# EAGLE board Data-logger_v01-01 (EAGLE 9.6.2)
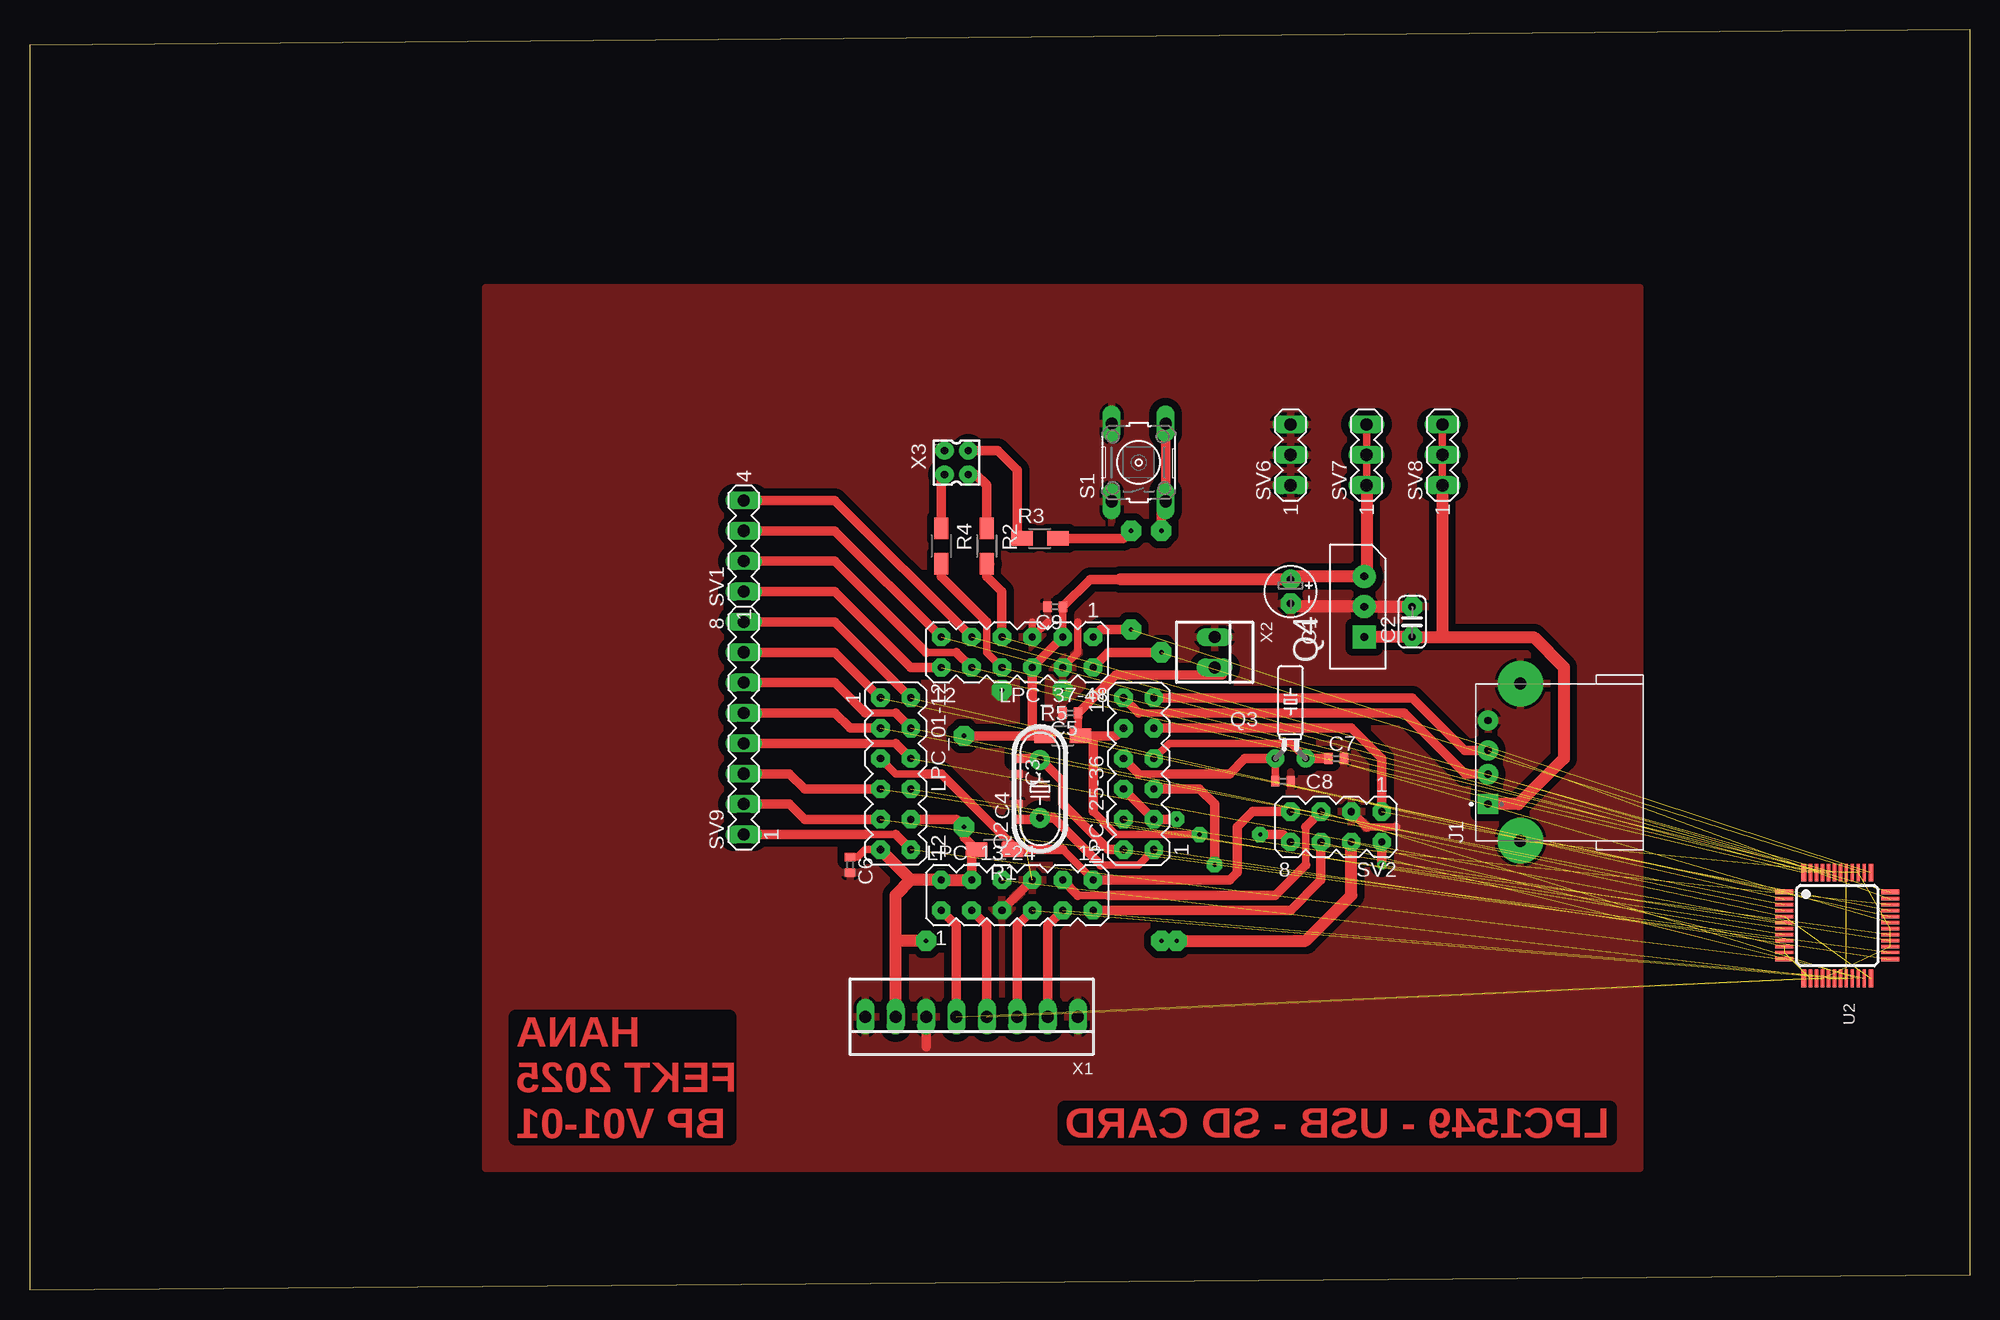
[diagram p0: board, top side]
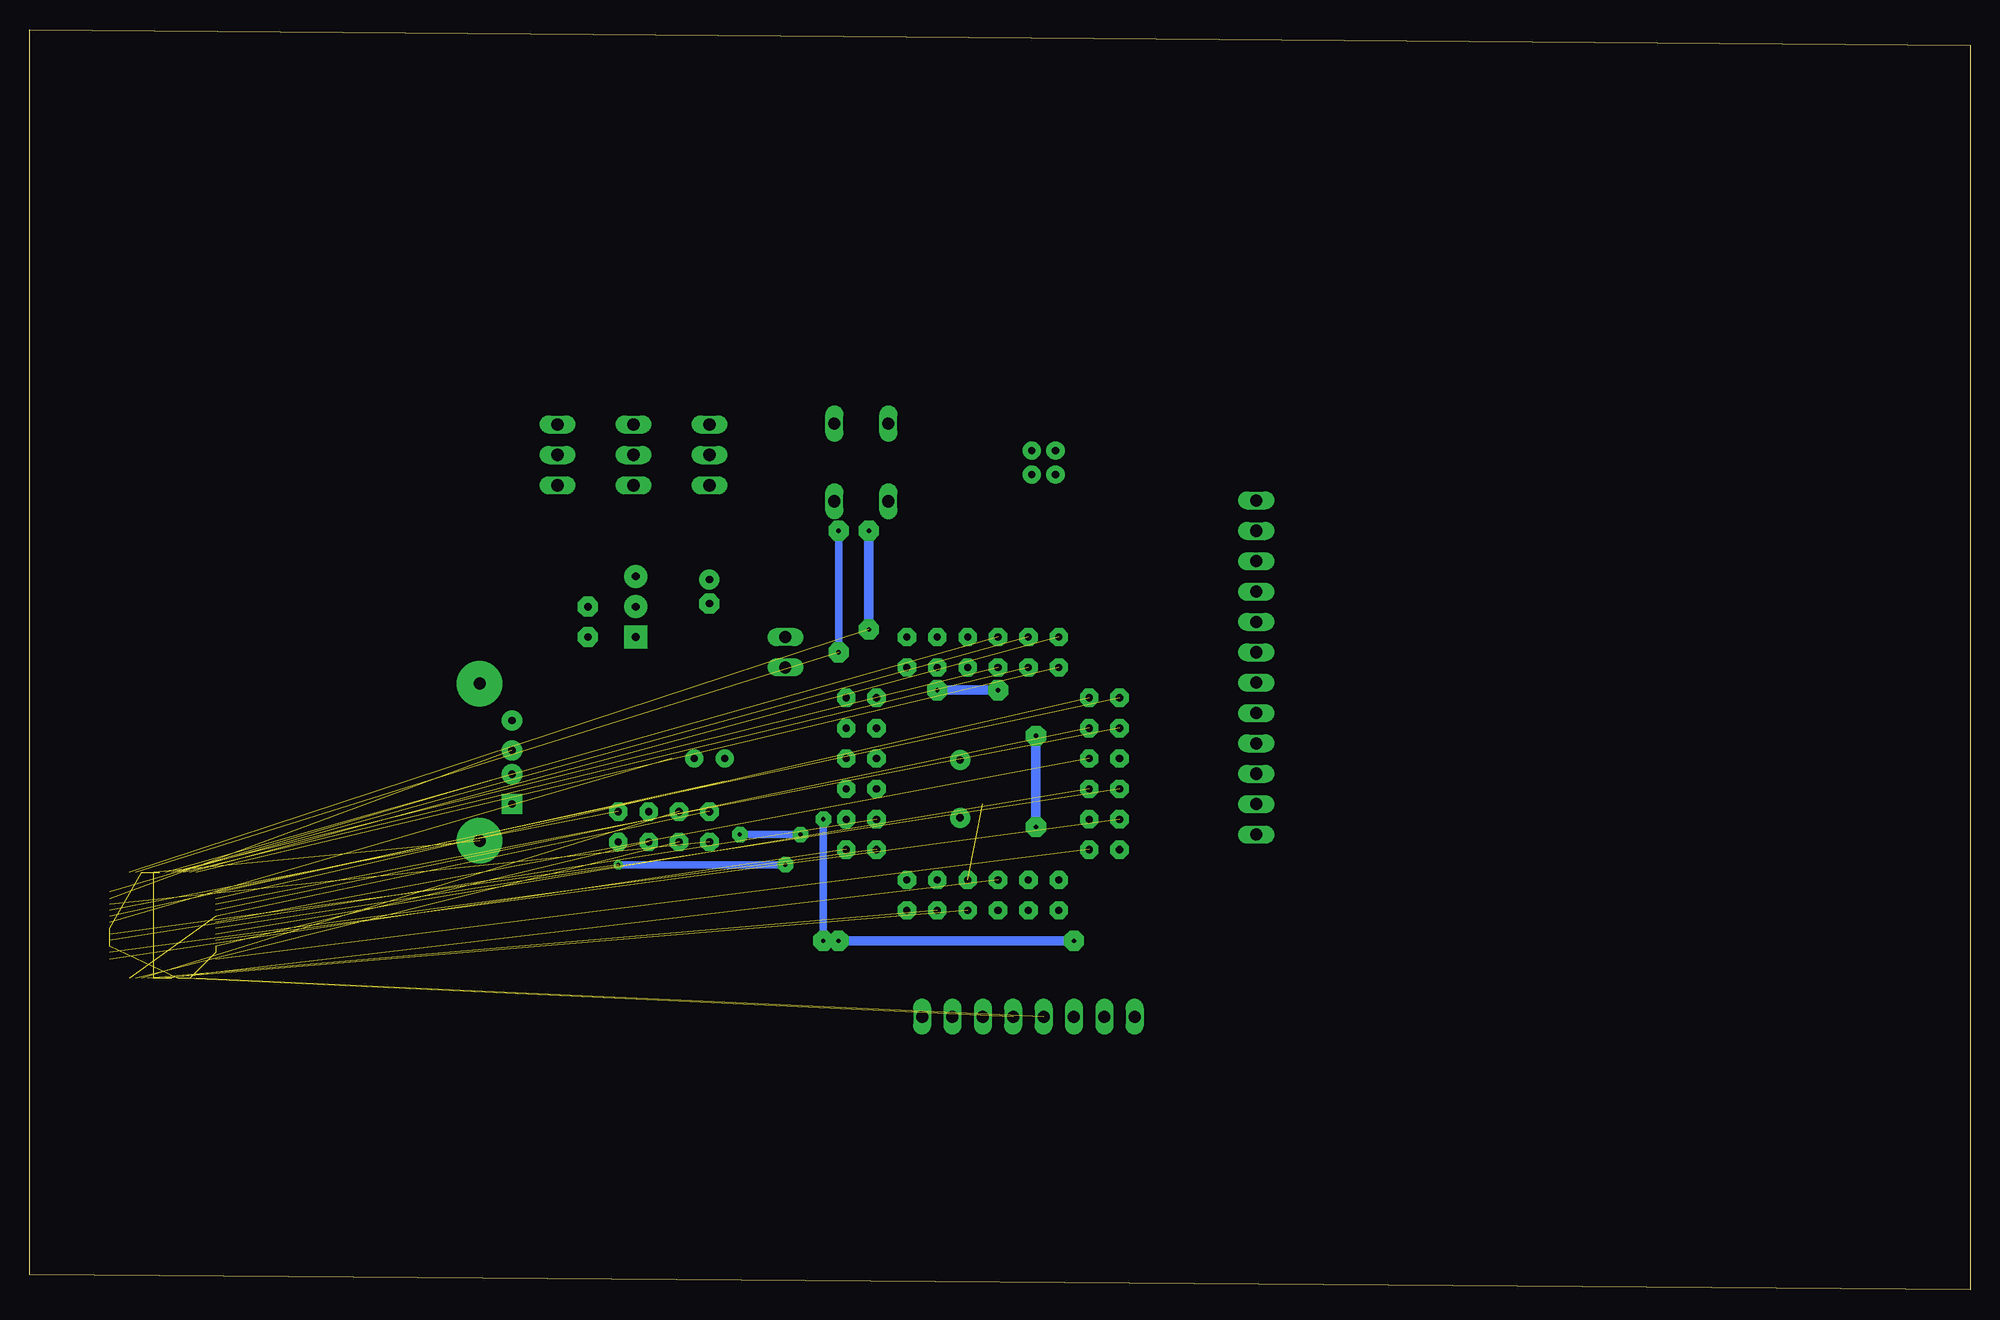
[diagram p1: board, bottom side, seen from below]

Size 162.23 x 105.4 mm. Coordinates in mm from the lower left corner, seen from the top.
Outline: 0,0 162.23,1.27 162.23,105.4 0,104.13 0,0
Copper layers (1*16): Top 0.035mm / dielectric 1.5mm / Bottom 0.035mm
Design rules "default *": minimum track width 6mil, minimum drill 0.35mm, track to track 6mil, track to pad 6mil, pad to pad 6mil, via to via 6mil, smd to smd 6mil, copper to edge 40mil, drill to drill 6mil, minimum pad ring 10mil, minimum via ring 8mil, stop-mask expansion 4mil, vias tented up to drill 0mil, thermal gap 10mil

## Footprints (pad centres in the part's own frame; a part is rotated, then mirrored left to right if it is on the bottom)
E2-4 = drill 0.6 pad 1.676: + -1.016,0 | drill 0.6 pad 1.676 octagon: - 1.016,0
C025-024X044 = drill 0.6 pad 1.676 octagon: 1 -1.27,0; 2 1.27,0
C0402 = smd 0.7 x 0.9: 1 -0.65,0; 2 0.65,0
TE_6364372-1 = drill 0.6 pad 1.676 square: 1 0,0 | drill 0.6 pad 1.676: 2 2.5,0; 3 4.5,0; 4 7,0 | drill 1 pad 3.81: S1 -3.07,-2.71; S2 10.07,-2.71
MA06-2 = drill 0.6 pad 1.524 octagon: 1 -6.35,-1.27; 2 -6.35,1.27; 3 -3.81,-1.27; 4 -3.81,1.27; 5 -1.27,-1.27; 6 -1.27,1.27; 7 1.27,-1.27; 8 1.27,1.27; 9 3.81,-1.27; 10 3.81,1.27; 11 6.35,-1.27; 12 6.35,1.27
HC49/S = drill 0.6 pad 1.676: 1 -2.413,0; 2 2.413,0
TC26H = drill 0.6 pad 1.524: 1 -1.27,0; 2 1.27,0
TO254P450X1020X1935-3P = drill 0.65 pad 1.93 square: 1 -5.08,-1.092 | drill 0.65 pad 1.93: 2 -2.54,-1.092; 3 0,-1.092
R1206W = smd 1.8 x 1.2: 1 -1.499,0; 2 1.499,0
B3F-10XX = drill 1.016 long: 1 -3.251,2.261; 2 3.251,2.261; 3 -3.251,-2.261; 4 3.251,-2.261
MA04-1 = drill 1.016 long: 1 -3.81,0; 2 -1.27,0; 3 1.27,0; 4 3.81,0
MA04-2 = drill 0.6 pad 1.524 octagon: 1 -3.81,-1.27; 2 -3.81,1.27; 3 -1.27,-1.27; 4 -1.27,1.27; 5 1.27,-1.27; 6 1.27,1.27; 7 3.81,-1.27; 8 3.81,1.27
MA03-1 = drill 1.016 long: 1 -2.54,0; 2 0,0; 3 2.54,0
MA08-1 = drill 1.016 long: 1 -8.89,0; 2 -6.35,0; 3 -3.81,0; 4 -1.27,0; 5 1.27,0; 6 3.81,0; 7 6.35,0; 8 8.89,0
SOT313-2 = smd 0.4 x 1.5: 1 -2.81,-4.425; 12 2.81,-4.425; 25 2.81,4.425; 36 -2.81,4.425 | smd 0.28 x 1.5: 2 -2.25,-4.425; 3 -1.75,-4.425; 4 -1.25,-4.425; 5 -0.75,-4.425; 6 -0.25,-4.425; 7 0.25,-4.425; 8 0.75,-4.425; 9 1.25,-4.425; 10 1.75,-4.425; 11 2.25,-4.425; 26 2.25,4.425; 27 1.75,4.425; 28 1.25,4.425; 29 0.75,4.425; 30 0.25,4.425; 31 -0.25,4.425; 32 -0.75,4.425; 33 -1.25,4.425; 34 -1.75,4.425; 35 -2.25,4.425 | smd 1.5 x 0.4: 13 4.425,-2.81; 24 4.425,2.81; 37 -4.425,2.81; 48 -4.425,-2.81 | smd 1.5 x 0.28: 14 4.425,-2.25; 15 4.425,-1.75; 16 4.425,-1.25; 17 4.425,-0.75; 18 4.425,-0.25; 19 4.425,0.25; 20 4.425,0.75; 21 4.425,1.25; 22 4.425,1.75; 23 4.425,2.25; 38 -4.425,2.25; 39 -4.425,1.75; 40 -4.425,1.25; 41 -4.425,0.75; 42 -4.425,0.25; 43 -4.425,-0.25; 44 -4.425,-0.75; 45 -4.425,-1.25; 46 -4.425,-1.75; 47 -4.425,-2.25
22-23-2081 = drill 1 long: 1 -8.89,0; 2 -6.35,0; 3 -3.81,0; 4 -1.27,0; 5 1.27,0; 6 3.81,0; 7 6.35,0; 8 8.89,0
22-23-2021 = drill 1 long: 1 -1.27,0; 2 1.27,0
87758-0416 = drill 0.6 pad 1.524: 1 -1,-1; 2 -1,1; 3 1,-1; 4 1,1

## Placement (x,y rotation side)
C1  2.2u  [E2-4]  105.41,58.42 270 top
C2  100n  [C025-024X044]  115.57,55.88 90 top
C3  33p  [C0402]  82.55,43.81 270 top
C4  33p  [C0402]  82.55,40 90 top
C5  100n  [C0402]  87,48.26 180 top
C6  100n  [C0402]  68.58,35.56 270 top
C7  22p  [C0402]  109.22,44.45 0 top
C8  22p  [C0402]  104.77,42.55 0 top
C9  100n  [C0402]  85.72,57.15 180 top
J1  6364372-1  [TE_6364372-1]  121.92,40.64 90 top
LPC_01-12  [MA06-2]  72.39,43.18 270 top
LPC_13-24  [MA06-2]  82.55,33.02 0 top
LPC_25-36  [MA06-2]  92.71,43.18 90 top
LPC_37-48  [MA06-2]  82.55,53.34 180 top
Q2  [HC49/S]  84.45,41.91 90 top
Q3  [TC26H]  105.41,44.45 0 top
Q4  LF33CV  [TO254P450X1020X1935-3P]  110.49,59.69 90 top
R1  4k7  [R1206W]  80.64,36.83 180 top
R2  1k1  [R1206W]  80.01,62.23 270 top
R3  300R  [R1206W]  84.45,62.87 0 top
R4  1k1  [R1206W]  76.2,62.23 270 top
R5  10k  [R1206W]  86.36,46.36 0 top
S1  [B3F-10XX]  92.71,69.22 90 top
SV1  [MA04-1]  59.69,62.23 90 top
SV2  [MA04-2]  109.22,38.73 180 top
SV6  [MA03-1]  105.41,69.85 90 top
SV7  [MA03-1]  111.76,69.85 90 top
SV8  [MA03-1]  118.11,69.85 90 top
SV9  [MA08-1]  59.69,46.99 90 top
U2  LPC1549JBD48  [SOT313-2]  151.13,30.48 270 top
X1  22-23-2081  [22-23-2081]  78.74,22.86 180 top
X2  22-23-2021  [22-23-2021]  99.06,53.34 270 top
X3  87758-0416  [87758-0416]  77.47,69.22 270 top

## Library data of the parts
C1-C9 = rcl; SPICEPREFIX: C
J1 = 6364372-1; AVAILABILITY: In Stock; CHECK_PRICES: https://www.snapeda.com/parts/6364372-1/TE+Connectivity+AMP+Connectors/view-part/?ref=eda; COMMENT: 6364372-1; DESCRIPTION: USB-A (USB TYPE-A) USB 2.0 Receptacle Connector 4 Position Through Hole, Right Angle; MF: TE Connectivity; MP: 6364372-1; PACKAGE: None; PRICE: None; SNAPEDA_LINK: https://www.snapeda.com/parts/6364372-1/TE+Connectivity+AMP+Connectors/view-part/?ref=snap
LPC_01-12 LPC_13-24 LPC_25-36 LPC_37-48 SV2 = con-header; OC_FARNELL: unknown; OC_NEWARK: unknown
Q2 = crystal; OC_FARNELL: 1667008; OC_NEWARK: unknown
Q3 = crystal; OC_FARNELL: unknown; OC_NEWARK: unknown
Q4 = LF33CV; AVAILABILITY: In Stock; CHECK_PRICES: https://www.snapeda.com/parts/LF33CV/STMicroelectronics/view-part/?ref=eda; DESCRIPTION: Linear Voltage Regulator IC Positive Fixed 1 Output 500mA TO-220; MF: STMicroelectronics; MP: LF33CV; PACKAGE: TO-220-3 STMicroelectronics; PRICE: None; SNAPEDA_LINK: https://www.snapeda.com/parts/LF33CV/STMicroelectronics/view-part/?ref=snap
R1-R5 = rcl; SPICEPREFIX: R
S1 = switch-omron; MPN: B3F-1000; OC_FARNELL: 176432; OC_NEWARK: 36M3542
SV1 SV6-SV9 = con-lstb; OC_FARNELL: unknown; OC_NEWARK: unknown
U2 = LPC1549JBD48; AVAILABILITY: In Stock; CHECK_PRICES: https://www.snapeda.com/parts/LPC1549JBD48/NXP+Semiconductors/view-part/?ref=eda; DESCRIPTION: ARM® Cortex®-M3 LPC15xx Microcontroller IC 32-Bit 72MHz 256KB (256K x 8) FLASH 48-LQFP (7x7); MF: NXP Semiconductors; MP: LPC1549JBD48; PACKAGE: QFP-48 NXP; PRICE: None; SNAPEDA_LINK: https://www.snapeda.com/parts/LPC1549JBD48/NXP+Semiconductors/view-part/?ref=snap
X1 = con-molex; MF: MOLEX; MPN: 22-23-2081; OC_FARNELL: 1756826; OC_NEWARK: 01C7592
X2 = con-molex; MF: MOLEX; MPN: 22-23-2021; OC_FARNELL: 1462926; OC_NEWARK: 25C3832
X3 = con-molex; MF: FARNELL; MPN: 87758-0416; OC_FARNELL: 7472315; OC_NEWARK: 39K3681

## Nets
+3V3: C1.+ C6.1 C9.1 LPC_01-12.10 LPC_01-12.11 LPC_13-24.2 LPC_13-24.4 LPC_25-36.3 LPC_25-36.6 LPC_37-48.3 LPC_37-48.6 Q4.3 R1.2 R5.1 SV2.4 SV7.1 SV7.2 SV7.3 U2.10 U2.11 U2.14 U2.16 U2.27 U2.30 U2.39 U2.42 X1.7
+5V: C2.1 J1.1 Q4.1 SV8.1 SV8.2 SV8.3
CS: LPC_13-24.1 U2.13 X1.5
GND: C1.- C2.2 C3.2 C4.2 C5.2 C6.2 C7.2 C8.2 C9.2 J1.4 J1.S1 J1.S2 LPC_13-24.5 LPC_13-24.8 LPC_37-48.4 LPC_37-48.5 Q4.2 S1.1 S1.2 SV2.3 SV6.1 SV6.2 SV6.3 U2.17 U2.20 U2.40 U2.41 X1.1 X1.6 X1.8 X2.1 X3.1
LPC01: LPC_01-12.1 SV9.7 U2.1
LPC02: LPC_01-12.2 SV9.8 U2.2
LPC03: LPC_01-12.3 SV9.5 U2.3
LPC04: LPC_01-12.4 SV9.6 U2.4
LPC06: LPC_01-12.6 SV9.4 U2.6
LPC07: LPC_01-12.7 SV9.3 U2.7
LPC08: LPC_01-12.8 U2.8
LPC09: LPC_01-12.9 SV9.2 U2.9
LPC12: LPC_01-12.12 SV9.1 U2.12
LPC18: LPC_13-24.6 U2.18
LPC24: LPC_01-12.5 LPC_13-24.12 R1.1 SV2.7 U2.5 U2.24
LPC25: C4.1 LPC_25-36.1 Q2.1 U2.25
LPC26: C3.1 LPC_25-36.2 Q2.2 U2.26
LPC28: LPC_25-36.4 U2.28
LPC31: C7.1 LPC_25-36.7 Q3.2 U2.31
LPC32: C8.1 LPC_25-36.8 Q3.1 U2.32
LPC37: LPC_37-48.1 R3.2 U2.37
LPC38: LPC_37-48.2 S1.3 S1.4 U2.38
LPC43: LPC_37-48.7 R2.2 U2.43
LPC44: LPC_37-48.8 R4.2 U2.44
LPC45: LPC_37-48.9 SV1.4 U2.45
LPC46: LPC_37-48.10 SV1.2 U2.46
LPC47: LPC_37-48.11 SV1.3 U2.47
LPC48: LPC_37-48.12 SV1.1 U2.48
MISO: LPC_13-24.9 U2.21 X1.2
MOSI: LPC_13-24.3 U2.15 X1.4
N$1: R2.1 X3.4
N$2: R3.1 X3.2
N$3: R4.1 X3.3
PRG_RESET: C5.1 LPC_25-36.10 R5.2 SV2.8 U2.34 X2.2
PRG_RXD: LPC_13-24.10 SV2.5 U2.22
PRG_SWCLK: LPC_25-36.5 SV2.2 U2.29
PRG_SWDIO: LPC_25-36.9 SV2.1 U2.33
PRG_TXD: LPC_13-24.11 SV2.6 U2.23
SCK: LPC_13-24.7 U2.19 X1.3
USB_DM: J1.2 LPC_25-36.12 U2.36
USB_DP: J1.3 LPC_25-36.11 U2.35

## Tracks (layer width: path | path; a pad name or v marks a point on that pad's centre or on a via)
+3V3  (via drill 0.35 pad 1.3, 0.35 pad 1.68)  (8 unrouted)
  Top 0.61: 105.41,59.69 C1.+ | 83.82,46.36 84.45,46.36 R5.1 | SV7.3 SV7.2 SV7.1 | 111.76,59.87 Q4.3 | LPC_37-48.3 86.36,57.13 C9.1 86.37,57.16 | C6.1 69.23,36.21 69.85,36.83 LPC_01-12.11
  Top 0.813: LPC_37-48.3 LPC_37-48.6 83.82,46.36 | v95.88,39.37 LPC_25-36.3 LPC_25-36.6 | LPC_13-24.4 78.74,36.42 R1.2 78.1,37.87 v78.1,38.73 77.47,39.37 LPC_01-12.10 | v78.1,46.36 84.45,46.36 | 91.19,59.44 88.65,59.44 86.37,57.16
  Top 1.016: LPC_13-24.4 LPC_13-24.2 73.66,34.29 | Q4.3 105.41,59.69 | C1.+ 91.19,59.44 | SV7.1 111.76,59.87 | 73.66,34.29 LPC_01-12.11 | 73.66,34.29 72.39,33.02 72.39,29.21 | X1.7 72.39,29.21 | SV2.4 110.49,33.02 106.68,29.21 v95.88,29.21 v94.61,29.21 | v74.93,29.21 72.39,29.21
  Bottom 0.61: v95.88,39.37 v95.88,29.21
  Bottom 0.813: v94.61,29.21 v74.93,29.21 | v78.1,46.36 v78.1,38.73
+5V
  Top 0.61: SV8.3 SV8.2 SV8.1
  Top 1.016: Q4.1 C2.1 118.11,54.61 | 118.11,54.61 125.73,54.61 128.27,52.07 128.27,44.45 124.46,40.64 J1.1 | SV8.1 118.11,54.61
CS  (1 unrouted)
  Top 0.813: X1.5 77.47,30.48 LPC_13-24.1
GND  (via drill 0.35 pad 1.68)  (5 unrouted)
  Top 0.61: 105.66,57.15 C1.- | 111.76,38.73 114.3,38.73 | 85.09,55.88 LPC_37-48.5 83.82,55.88 | LPC_37-48.4 87.63,53.34 87.63,55.88
  Top 0.813: LPC_13-24.8 LPC_13-24.5 | X1.6 74.93,20.32 | SV2.3 111.76,38.73
  Top 1.016: C2.2 Q4.2 105.66,57.15
  Bottom 0.813: v86.36,50.16 v81.28,50.16
  pour Top (isolate 0.61): 38.1,83.82 134.62,83.82 134.62,10.16 38.1,10.16
LPC01  (1 unrouted)
  Top 0.813: LPC_01-12.1 67.31,53.34 SV9.7
LPC02  (1 unrouted)
  Top 0.813: SV9.8 67.31,55.88 LPC_01-12.2
LPC03  (1 unrouted)
  Top 0.813: SV9.5 67.31,48.26 68.58,46.99 LPC_01-12.3
LPC04  (1 unrouted)
  Top 0.61: 69.85,48.26 72.39,48.26
  Top 0.813: SV9.6 67.31,50.8 69.85,48.26 | 72.39,48.26 LPC_01-12.4
LPC06  (1 unrouted)
  Top 0.61: 69.85,45.72 72.39,45.72
  Top 0.813: 72.39,45.72 LPC_01-12.6 | SV9.4 69.85,45.72
LPC07  (1 unrouted)
  Top 0.813: LPC_01-12.7 64.77,41.91 63.5,43.18 SV9.3
LPC08  (1 unrouted)
LPC09  (1 unrouted)
  Top 0.813: LPC_01-12.9 64.77,39.37 63.5,40.64 SV9.2
LPC12  (1 unrouted)
  Top 0.61: 72.39,38.1 69.85,38.1
  Top 0.813: LPC_01-12.12 72.39,38.1 | 69.85,38.1 SV9.1
LPC18  (1 unrouted)
LPC24  (2 unrouted)
  Top 0.61: LPC_01-12.5 72.39,43.18 74.93,43.18 | 86.36,36.83 LPC_13-24.12
  Top 0.813: LPC_13-24.12 100.33,34.29 100.97,34.92 100.97,38.73 102.23,40 SV2.7 | 86.36,36.83 R1.1 82.14,37.24 76.2,43.18 74.93,43.18
LPC25  (1 unrouted)
  Top 0.61: LPC_25-36.1 92.71,35.56 89.53,35.56 | Q2.1 84.31,39.36
  Top 0.813: 84.31,39.36 C4.1 | Q2.1 85.6,39.5 89.53,35.56
LPC26  (1 unrouted)
  Top 0.61: 84.31,44.47 Q2.2 84.58,44.32
  Top 0.813: C3.1 84.31,44.47 | 84.58,44.32 86.36,42.55 86.36,40.64 90.17,36.83 LPC_25-36.2
LPC28  (1 unrouted)
LPC31  (1 unrouted)
  Top 0.61: LPC_25-36.7 95.25,45.72 105.41,45.72 Q3.2
  Top 0.813: C7.1 Q3.2
LPC32  (1 unrouted)
  Top 0.61: 92.71,43.18 95.25,43.18 | Q3.1 104.14,42.56 C8.1
  Top 0.813: 92.71,43.18 LPC_25-36.8 | Q3.1 101.6,44.45 100.33,43.18 95.25,43.18
LPC37  (via drill 0.35 pad 1.68)  (1 unrouted)
  Top 0.813: LPC_37-48.1 89.53,55.24 v92.07,55.24 | v92.07,63.5 91.44,62.87 R3.2
  Bottom 0.813: v92.07,55.24 v92.07,63.5
LPC38  (via drill 0.35 pad 1.68)  (1 unrouted)
  Top 0.813: LPC_37-48.2 90.17,53.34 v94.61,53.34 | v94.61,63.5 94.61,65.61 S1.3 S1.4
  Bottom 0.61: v94.61,63.5 v94.61,53.34
LPC43  (1 unrouted)
  Top 0.813: 80.24,60.73 R2.2 80.01,59.69 81.28,58.42 LPC_37-48.7
LPC44  (1 unrouted)
  Top 0.61: LPC_37-48.8 80.01,53.34 80.01,55.88
  Top 0.813: 80.01,55.88 76.2,59.69 R4.2
LPC45  (1 unrouted)
  Top 0.813: LPC_37-48.9 67.31,66.04 SV1.4
LPC46  (1 unrouted)
  Top 0.61: 74.93,53.34 77.47,53.34
  Top 0.813: 77.47,53.34 LPC_37-48.10 | 74.93,53.34 67.31,60.96 SV1.2
LPC47  (1 unrouted)
  Top 0.813: LPC_37-48.11 67.31,63.5 SV1.3
LPC48  (1 unrouted)
  Top 0.813: LPC_37-48.12 73.66,52.07 67.31,58.42 SV1.1
MISO  (1 unrouted)
  Top 0.813: X1.2 85.09,30.48 LPC_13-24.9
MOSI  (1 unrouted)
  Top 0.813: X1.4 80.01,30.48 LPC_13-24.3
N$1
  Top 0.813: R2.1 80.01,67.31 79.1,68.22 X3.4
N$2
  Top 0.813: R3.1 82.55,63.27 82.55,68.58 80.91,70.22 X3.2
N$3
  Top 0.813: R4.1 76.2,67.94 X3.3
PRG_RESET  (via drill 0.35 pad 1.3)  (1 unrouted)
  Top 0.61: 88.9,46.36 R5.2 87.64,46.57 C5.1 | v97.79,38.1 90.81,38.1 88.9,40 | 99.69,51.43 99.69,51.44 X2.2
  Top 0.813: SV2.8 104.77,38.1 v102.87,38.1 | LPC_25-36.10 90.81,46.36 88.9,46.36 88.9,40 | C5.1 90.81,51.43 99.69,51.43
  Bottom 0.61: v102.87,38.1 v97.79,38.1
PRG_RXD  (1 unrouted)
  Top 0.61: 106.68,38.73 106.68,35.56 | 90.17,33.02 87.63,33.02
  Top 0.813: 87.63,33.02 LPC_13-24.10 | SV2.5 106.68,38.73 | 106.68,35.56 104.14,33.02 90.17,33.02
PRG_SWCLK  (via drill 0.35, 0.35 pad 1.3)  (1 unrouted)
  Top 0.813: SV2.2 v113.03,35.56 | LPC_25-36.5 97.79,41.91 99.06,40.64 v99.06,35.56
  Bottom 0.61: v113.03,35.56 v99.06,35.56
PRG_SWDIO  (1 unrouted)
  Top 0.813: SV2.1 113.03,44.45 110.49,46.99 LPC_25-36.9
PRG_TXD  (1 unrouted)
  Top 0.813: LPC_13-24.11 105.41,31.75 107.95,34.29 SV2.6
SCK  (1 unrouted)
  Top 0.813: X1.3 82.55,30.48 LPC_13-24.7
USB_DM  (1 unrouted)
  Top 0.61: 121.92,43.18 J1.2 | 95.25,48.26 92.71,48.26
  Top 0.813: 92.71,48.26 LPC_25-36.12 | 121.92,43.18 120.02,43.18 114.94,48.26 95.25,48.26
USB_DP  (1 unrouted)
  Top 0.813: J1.3 119.96,45.14 115.57,49.53 LPC_25-36.11

## Text on the board
Top: HANA / FEKT 2025 / BP V01-01 | LPC1549 - USB - SD CARD
tDocu: nepropojena zem